# Altium PCB APB_Filter_Test_Board.PcbDoc
Units mm, origin at the board's own origin, x right, y up, seen from the top; angles counter-clockwise.
Board outline 57.4 x 16.38 mm, 2 copper layers (Top Layer, Bottom Layer); 27 components, 18 nets, 74 pads, 44 vias.
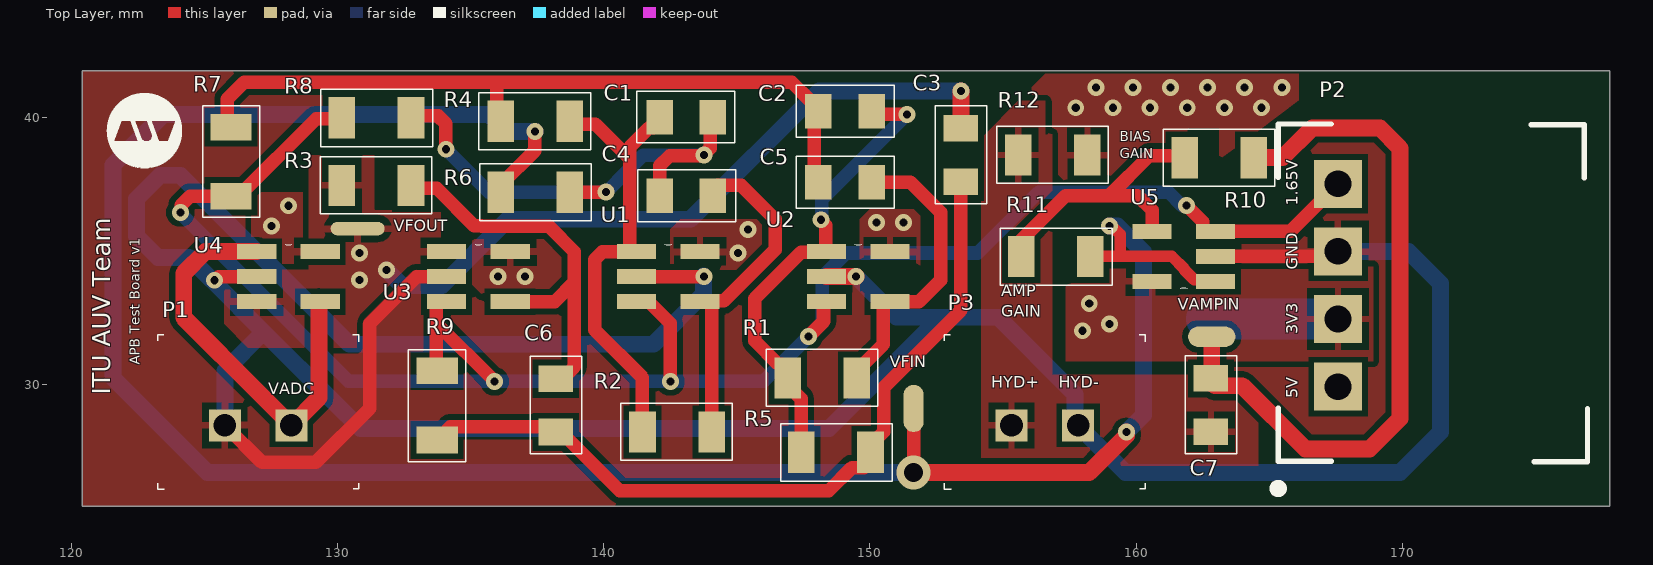
[diagram p0: Top Layer view]
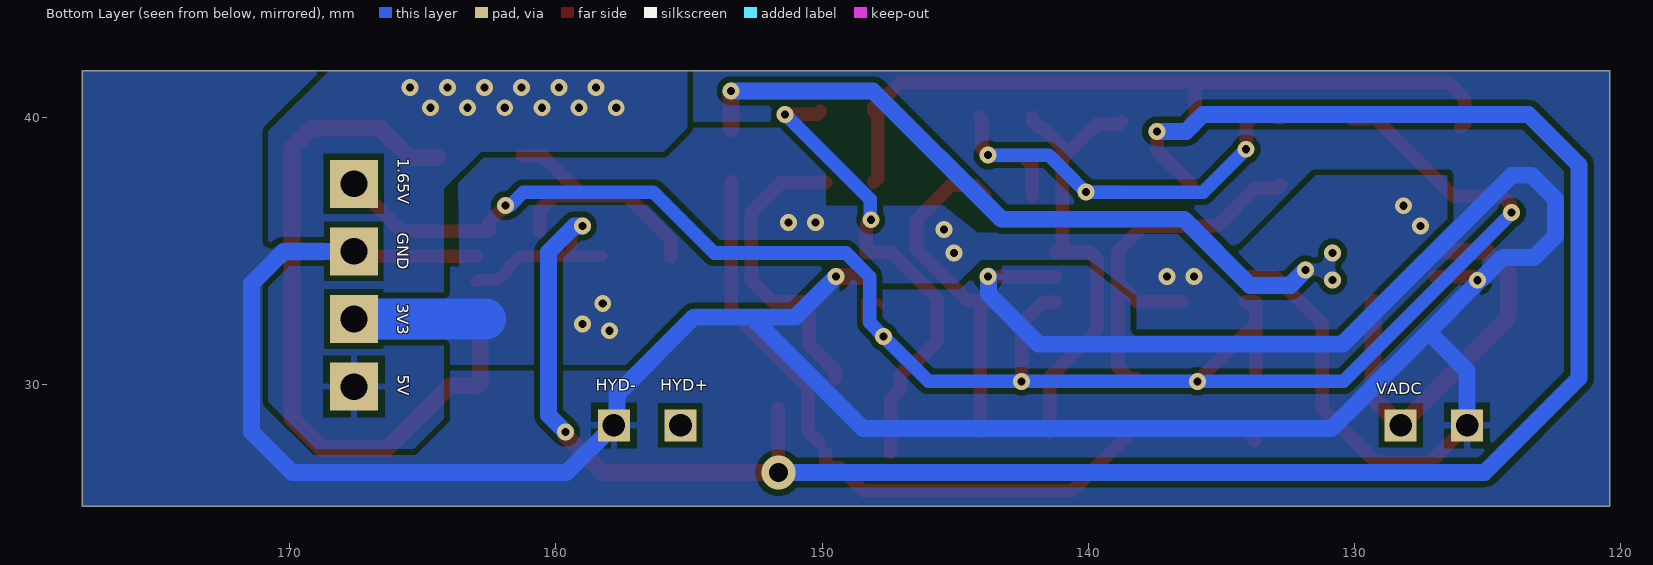
[diagram p1: Bottom Layer view, seen from below]
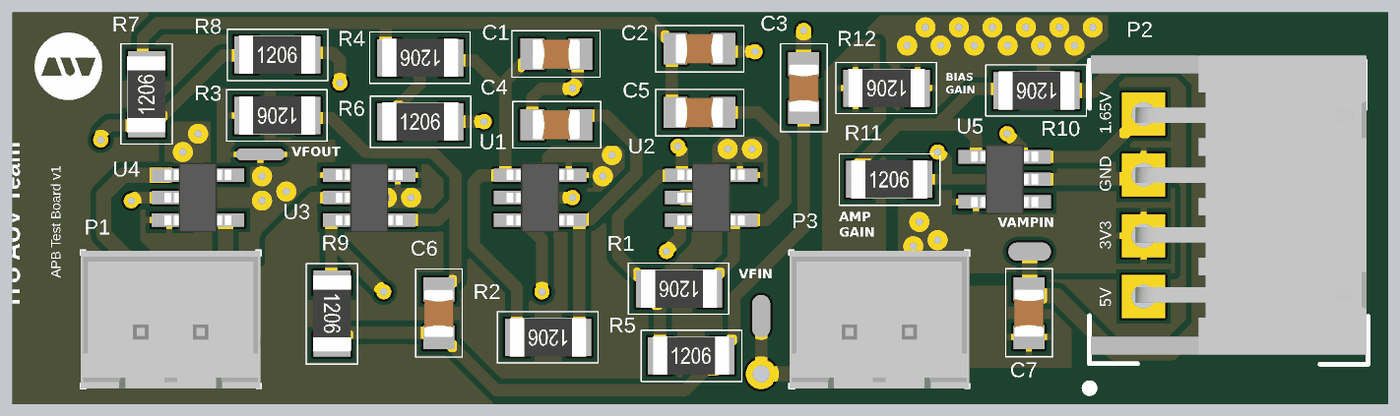
[diagram p2: 3D render of the assembled board from above, using the file's embedded part models]

## Layer stack, top to bottom
Top Solder: solder mask 0.0102, Solder Resist, Dk 3.5
Top Layer: signal copper 0.0356
Dielectric 1: dielectric 0.32, FR-4, Dk 4.8
Bottom Layer: signal copper 0.0356
Bottom Solder: solder mask 0.0102, Solder Resist, Dk 3.5

## Board outline
120.396,25.4 120.396,41.783 177.8,41.783 177.8,25.4

## Design rules (kind name [scope] priority, off if disabled: settings)
Clearance [All] p1: gap=0.229 ignorepadtopadclearanceinfootprint=FALSE except(0: Arc-Text Track-Text SMDPad-Text THPad-Text Via-Text Fill-Text Poly-Text Region-Text Text-Text Text-Hole; 0.203: SMDPad-SMDPad SMDPad-THPad THPad-THPad; 0.254: Arc-Arc Arc-Track Arc-SMDPad Arc-THPad Arc-Via Track-Track Track-SMDPad Track-THPad Track-Via SMDPad-Via THPad-Via Via-Via)
FabricationTestPointUsage [All] p1: valid=0 allowmultiple=TRUE
MinimumSolderMaskSliver [All] p1: minsoldermaskwidth=0.127
PolygonConnect [All] p1: connectstyle=Relief reliefconductorwidth=0.254 reliefentries=4 polygonreliefangle="90 Angle" airgapwidth=0.254
RoutingVias [All] p1: holewidth=0.305 width=0.635 viastyle="Through Hole" minholewidth=0.305 minwidth=0.635 maxholewidth=0.711 maxwidth=1.27
SolderMaskExpansion [All] p1: expansion=0.102 istentingtop=FALSE
Width [All] p1: maxlimit=1.524 minlimit=0.254 preferedwidth=0.635 minimp=50.000000 maximp=50.000000 favimp=50.000000
28 further rules are at their usual default settings.

## Classes and differential pairs
component class Input-Output: C7 P1 P2 P3 R10 R11 R12 U5
component class "ADC Buffering": U4
component class "6 Pole Butterworth Bandpass Filter": C1 C2 C3 C4 C5 C6 R1 R2 R3 R4 R5 R6 R7 R8 R9 U1 U2 U3

## Components (designator, comment, footprint, x,y, rotation, side; value= is the part's Value field where it differs from the comment)
C1 "1000 pF" "CAP 0805_2012 RF" 143.091,40.03 r180 top
C2 "1000 pF" "CAP 0805_2012 RF" 149.06,40.259 r0 top
C3 "1000 pF" "CAP 0805_2012 RF" 153.416,38.608 r90 top
C4 "1000 pF" "CAP 0805_2012 RF" 143.091,37.084 r0 top
C5 "1000 pF" "CAP 0805_2012 RF" 149.06,37.592 r0 top
C6 "1000 pF" "CAP 0805_2012 RF" 138.19,29.196 r90 top
C7 "0.1 µF" "CAP 0805_2012 RF" 162.814,29.21 r90 top
P1 "WIRE-TO BOARD WAFER, 2.5MM, 2 CO" 51025-02-0100-01 127,28.448 r180 top
P2 "WIRE-TO BOARD HEADER, 2.5MM, 4 C" 51125-04-0200-01 172.593,33.274 r90 top
P3 "WIRE-TO BOARD WAFER, 2.5MM, 2 CO" 51025-02-0100-01 156.571,28.448 r180 top
R1 "46.4 kOhms" "RES 1206_3216 RF" 148.209,30.226 r180 top
R2 "62 kOhms" "RES 1206_3216 RF" 142.748,28.194 r180 top
R3 "26.7 kOhms" "RES 1206_3216 RF" 131.445,37.465 r180 top locked
R4 "11.3 kOhms" "RES 1206_3216 RF" 137.414,39.878 r180 top
R5 "13.3 kOhms" "RES 1206_3216 RF" 148.72,27.432 r0 top
R6 "15.4 kOhms" "RES 1206_3216 RF" 137.414,37.211 r0 top
R7 "340 Ohms" "RES 1206_3216 RF" 125.984,38.354 r90 top
R8 "470 Ohms" "RES 1206_3216 RF" 131.445,40.005 r0 top
R9 "820 Ohms" "RES 1206_3216 RF" 133.731,29.196 r270 top
R10 "1 kOhms" "RES 1206_3216 RF" 163.131,38.507 r180 top
R11 "10 kOhms" "RES 1206_3216 RF" 156.986,34.798 r0 top locked
R12 "2 kOhms" "RES 1206_3216 RF" 156.873,38.608 r180 top
U1 "AD8065ARTZ-REEL7" SOT95P290X145-5N 142.418,34.036 r0 top
U2 "AD8065ARTZ-REEL7" SOT95P290X145-5N 149.555,34.036 r0 top
U3 "AD8065ARTZ-REEL7" SOT95P290X145-5N 135.28,34.036 r0 top
U4 "AD8065ARTZ-REEL7" SOT95P290X145-5N 128.143,34.036 r0 top
U5 "AD8065ARTZ-REEL7" SOT95P290X145-5N 161.798,34.798 r180 top

## Footprints (in the part's own frame and the unit in brackets; to place one, negate y for a bottom-side part, rotate by r counter-clockwise, add the part's x,y. Pads: shape width x height; smd on the part's side, far side on the other; paste and mask are expansions set on the pad)
51025-02-0100-01 [mm]
  rect 1.2x1.2 hole 0.85: 1(-1.25,0) 2(1.25,0)
  silkscreen extent -3.77,-3.4 3.77,2.4, body extent -3.75,-3.37 3.75,2.38, height 7
51125-04-0200-01 [mm]
  rect 1.8x1.8 hole 1: 1(-3.37,5) 2(-0.83,5) 3(1.71,5) 4(4.25,5)
  silkscreen extent -7.35,-4.38 6.5,7.4, body extent -5.8,-4.3 6.7,7.2, height 5.87
"CAP 0805_2012 RF" [mm] "Chip Capacitor, 2-Leads, Body 2.00x1.20mm, IPC High Density"
  rect 1x1.3 smd: 1(-1,0) 2(1,0)
  silkscreen extent -1.82,-0.98 1.86,0.97, body extent -1,-0.63 1,0.62, height 0.61
"RES 1206_3216 RF" [mm] "Chip Resistor, 2-Leads, Body 3.13x1.55mm, IPC High Density"
  rect 1x1.55 smd: 1(-1.3,0) 2(1.3,0)
  silkscreen extent -2.08,-1.08 2.11,1.07, body extent -1.6,-0.8 1.6,0.8, height 0.59
SOT95P290X145-5N [mil]
  rect 58x22 smd: 1(-47,37) 2(-47,0) 3(-47,-37) 4(47,-37) 5(47,37)
  silkscreen extent -5,47 5,48, body extent -55,-57 55,57, height 57

## Part data
C1 C2 C3 C4 C5 C6: library part CS0805KRX7RBBB102, "CAP CER 1000PF 500V X7R 0805", Device Package="0805 (2012 Metric)", Manufacturer=Yageo, Operating Temperature="-55°C ~ 125°C", Supplier Part Number 1=311-3593-1-ND, Temperature Coefficient=X7R, Tolerance=±10%, Voltage - Rated=500V, Applications="Boardflex Sensitive", Capacitance="1000 pF", ComponentLink1Description=Datasheet, ComponentLink1URL=http://www.yageo.com/NewPortal/yageodocoutput?fileName=/pdf/MLCC/UPY-ST_NPOX7R_16V-to-3KV_5.pdf, ComponentLink2Description="DigiKey Link", ComponentLink2URL=https://www.digikey.com/en/products/detail/yageo/CS0805KRX7RBBB102/6097992, Features="Soft Termination", lastupdated="12.04.2022 22:11:41", Lifecycle Status=Active, Minimum Order=1, Mounting Type="Surface Mount, MLCC", Package / Case="0805 (2012 Metric)", Packaging=TapeAndReel, Part Number=CS0805KRX7RBBB102, Part Status=Active, PartId=2739, Price=0.06, Series=CS, Size / Dimension="0.079\" L x 0.049\" W (2.00mm x 1.25mm)", Supplier 1=DigiKey, Thickness (Max)="0.039\" (1.00mm)"
C7: library part CC0805MRX7R9BB104, "CAP CER 0.1UF 50V X7R 0805", Device Package="0805 (2012 Metric)", Manufacturer=Yageo, Operating Temperature="-55°C ~ 125°C", Supplier Part Number 1=311-4351-1-ND, Temperature Coefficient=X7R, Tolerance=±20%, Voltage - Rated=50V, Applications="General Purpose", Capacitance="0.1 µF", ComponentLink1Description=Datasheet, ComponentLink1URL=https://www.yageo.com/upload/media/product/productsearch/datasheet/mlcc/UPY-GPHC_X7R_6.3V-to-50V_18.pdf, ComponentLink2Description="DigiKey Link", ComponentLink2URL=https://www.digikey.com/en/products/detail/yageo/CC0805MRX7R9BB104/5884281, lastupdated="12.04.2022 22:11:41", Lifecycle Status=Active, Minimum Order=1, Mounting Type="Surface Mount, MLCC", Package / Case="0805 (2012 Metric)", Packaging=TapeAndReel, Part Number=CC0805MRX7R9BB104, Part Status=Active, PartId=2475, Price=0.02, Series=CC, Size / Dimension="0.079\" L x 0.049\" W (2.00mm x 1.25mm)", Supplier 1=DigiKey, Thickness (Max)="0.037\" (0.95mm)"
P1 P3: library part 51025-02-0100-01, "Connector Header Through Hole 2 position 0.098\" (2.50mm)", Manufacturer="CNC Tech", Supplier Part Number 1=1175-51025-02-0100-01-ND, Manufacturer Part Number=51025-02-0100-01, Pricing 1="1=0,10000, 10=0,08300, 100=0,06090, 500=0,05040, 1000=0,04410, 5000=0,03780, 10000=0,03675 (USD)", RoHS=No, Stock 1=15526, Supplier 1=Digi-Key
P2: library part 51125-04-0200-01, "Wire-to Board Header, 2.5MM, 4 C", Manufacturer="CNC Tech", Supplier Part Number 1=1175-51125-04-0200-01-ND, Category=Connectors, Manufacturer Part Number=51125-04-0200-01, Pricing 1="1=0,21000, 10=0,17700, 100=0,13650, 500=0,11550, 1000=0,09450, 5000=0,08400, 10000=0,07613 (USD)", RoHS=No, Stock 1=5369, Supplier 1=Digi-Key
R1: library part RT0805DRE0746K4L, "RES SMD 46.4K OHM 0.5% 1/8W 0805", Device Package="0805 (2012 Metric)", Manufacturer=Yageo, Operating Temperature="-55°C ~ 155°C", Power (Watts)="0.125W, 1/8W", Supplier Device Package=0805, Supplier Part Number 1=311-2866-1-ND, Temperature Coefficient=±50ppm/°C, Tolerance=±0.5%, ComponentLink1Description=Datasheet, ComponentLink1URL=https://www.yageo.com/upload/media/product/productsearch/datasheet/rchip/PYu-RT_1-to-0.01_RoHS_L_11.pdf, ComponentLink2Description="DigiKey Link", ComponentLink2URL=https://www.digikey.com/en/products/detail/yageo/RT0805DRE0746K4L/1078715, Composition="Thin Film", Height - Seated (Max)="0.024\" (0.60mm)", lastupdated="12.04.2022 22:40:28", Lifecycle Status=Active, Minimum Order=1, Number of Terminations=2, Package / Case="0805 (2012 Metric)", Packaging=TapeAndReel, Part Number=RT0805DRE0746K4L, Part Status=Active, PartId=31477, Price=0.01, Resistance="46.4 kOhms", Series=RT, Size / Dimension="0.079\" L x 0.049\" W (2.00mm x 1.25mm)", Supplier 1=DigiKey
R2: library part CPF0805B62KE1, "RES SMD 62K OHM 0.1% 1/10W 0805", Device Package="0805 (2012 Metric)", Manufacturer="TE Connectivity Passive Product", Operating Temperature="-55°C ~ 155°C", Power (Watts)="0.1W, 1/10W", Supplier Device Package=0805, Supplier Part Number 1=A103230CT-ND, Temperature Coefficient=±25ppm/°C, Tolerance=±0.1%, ComponentLink1Description=Datasheet, ComponentLink1URL=https://www.te.com/commerce/DocumentDelivery/DDEController?Action=srchrtrv&DocNm=1773200&DocType=DS&DocLang=English, ComponentLink2Description="DigiKey Link", ComponentLink2URL=https://www.digikey.com/en/products/detail/te-connectivity-passive-product/CPF0805B62KE1/2382068, Composition="Thin Film", Height - Seated (Max)="0.026\" (0.65mm)", lastupdated="12.04.2022 22:40:19", Lifecycle Status=Active, Minimum Order=1, Number of Terminations=2, Package / Case="0805 (2012 Metric)", Packaging=TapeAndReel, Part Number=CPF0805B62KE1, Part Status=Active, PartId=34241, Price=0.13, Resistance="62 kOhms", Series="CPF, Neohm", Size / Dimension="0.079\" L x 0.049\" W (2.00mm x 1.25mm)", Supplier 1=DigiKey
R3: library part ERJ-6ENF2672V, "RES SMD 26.7K OHM 1% 1/8W 0805", Device Package="0805 (2012 Metric)", Manufacturer="Panasonic Electronic Components", Operating Temperature="-55°C ~ 155°C", Power (Watts)="0.125W, 1/8W", Ratings=AEC-Q200, Supplier Device Package=0805, Supplier Part Number 1=P26.7KCCT-ND, Temperature Coefficient=±100ppm/°C, Tolerance=±1%, ComponentLink1Description=Datasheet, ComponentLink1URL=https://industrial.panasonic.com/cdbs/www-data/pdf/RDA0000/AOA0000C304.pdf, ComponentLink2Description="DigiKey Link", ComponentLink2URL=https://www.digikey.com/en/products/detail/panasonic-electronic-components/ERJ-6ENF2672V/111557, Composition="Thick Film", Features="Automotive AEC-Q200", Height - Seated (Max)="0.028\" (0.70mm)", lastupdated="12.04.2022 22:40:32", Lifecycle Status=Active, Minimum Order=1, Number of Terminations=2, Package / Case="0805 (2012 Metric)", Packaging=TapeAndReel, Part Number=ERJ-6ENF2672V, Part Status=Active, PartId=30267, Price=0.01, Resistance="26.7 kOhms", Series=ERJ-6EN, Size / Dimension="0.079\" L x 0.049\" W (2.00mm x 1.25mm)", Supplier 1=DigiKey
R4: library part RK73H2ATTD1132F, "RES 11.3K OHM 1% 1/4W 0805", Device Package="0805 (2012 Metric)", Manufacturer="KOA Speer Electronics, Inc.", Operating Temperature="-55°C ~ 155°C", Power (Watts)="0.25W, 1/4W", Ratings=AEC-Q200, Supplier Device Package=0805, Supplier Part Number 1=2019-RK73H2ATTD1132FCT-ND, Temperature Coefficient=±100ppm/°C, Tolerance=±1%, ComponentLink1Description=Datasheet, ComponentLink1URL=http://www.koaspeer.com/catimages/Products/RK73H/RK73H.pdf, ComponentLink2Description="DigiKey Link", ComponentLink2URL=https://www.digikey.com/en/products/detail/koa-speer-electronics-inc/RK73H2ATTD1132F/10233627, Composition="Thick Film", Features="Automotive AEC-Q200, Moisture Resistant", Height - Seated (Max)="0.024\" (0.60mm)", lastupdated="12.04.2022 22:40:20", Lifecycle Status=Active, Minimum Order=1, Number of Terminations=2, Package / Case="0805 (2012 Metric)", Packaging=TapeAndReel, Part Number=RK73H2ATTD1132F, Part Status=Active, PartId=33915, Price=0.01, Resistance="11.3 kOhms", Series=RK73H, Size / Dimension="0.079\" L x 0.049\" W (2.00mm x 1.25mm)", Supplier 1=DigiKey
R5: library part RK73H2BTTD1332F, "RES 13.3K OHM 1% 1/4W 1206", Device Package="1206 (3216 Metric)", Manufacturer="KOA Speer Electronics, Inc.", Operating Temperature="-55°C ~ 155°C", Power (Watts)="0.25W, 1/4W", Ratings=AEC-Q200, Supplier Device Package=1206, Supplier Part Number 1=2019-RK73H2BTTD1332FCT-ND, Temperature Coefficient=±100ppm/°C, Tolerance=±1%, ComponentLink1Description=Datasheet, ComponentLink1URL=http://www.koaspeer.com/catimages/Products/RK73H/RK73H.pdf, ComponentLink2Description="DigiKey Link", ComponentLink2URL=https://www.digikey.com/en/products/detail/koa-speer-electronics-inc/RK73H2BTTD1332F/10236178, Composition="Thick Film", Features="Automotive AEC-Q200, Moisture Resistant", Height - Seated (Max)="0.028\" (0.70mm)", lastupdated="12.04.2022 22:34:22", Lifecycle Status=Active, Minimum Order=1, Number of Terminations=2, Package / Case="1206 (3216 Metric)", Packaging=TapeAndReel, Part Number=RK73H2BTTD1332F, Part Status=Active, PartId=27243, Price=0.01, Resistance="13.3 kOhms", Series=RK73H, Size / Dimension="0.126\" L x 0.063\" W (3.20mm x 1.60mm)", Supplier 1=DigiKey
R6: library part ERJ-6ENF1542V, "RES SMD 15.4K OHM 1% 1/8W 0805", Device Package="0805 (2012 Metric)", Manufacturer="Panasonic Electronic Components", Operating Temperature="-55°C ~ 155°C", Power (Watts)="0.125W, 1/8W", Ratings=AEC-Q200, Supplier Device Package=0805, Supplier Part Number 1=P15.4KCCT-ND, Temperature Coefficient=±100ppm/°C, Tolerance=±1%, ComponentLink1Description=Datasheet, ComponentLink1URL=https://industrial.panasonic.com/cdbs/www-data/pdf/RDA0000/AOA0000C304.pdf, ComponentLink2Description="DigiKey Link", ComponentLink2URL=https://www.digikey.com/en/products/detail/panasonic-electronic-components/ERJ-6ENF1542V/111510, Composition="Thick Film", Features="Automotive AEC-Q200", Height - Seated (Max)="0.028\" (0.70mm)", lastupdated="12.04.2022 22:40:33", Lifecycle Status=Active, Minimum Order=1, Number of Terminations=2, Package / Case="0805 (2012 Metric)", Packaging=TapeAndReel, Part Number=ERJ-6ENF1542V, Part Status=Active, PartId=30250, Price=0.01, Resistance="15.4 kOhms", Series=ERJ-6EN, Size / Dimension="0.079\" L x 0.049\" W (2.00mm x 1.25mm)", Supplier 1=DigiKey
R7: library part ERJ-8ENF3400V, "RES SMD 340 OHM 1% 1/4W 1206", Device Package="1206 (3216 Metric)", Manufacturer="Panasonic Electronic Components", Operating Temperature="-55°C ~ 155°C", Power (Watts)="0.25W, 1/4W", Ratings=AEC-Q200, Supplier Device Package=1206, Supplier Part Number 1=P340FCT-ND, Temperature Coefficient=±100ppm/°C, Tolerance=±1%, ComponentLink1Description=Datasheet, ComponentLink1URL=https://industrial.panasonic.com/cdbs/www-data/pdf/RDA0000/AOA0000C304.pdf, ComponentLink2Description="DigiKey Link", ComponentLink2URL=https://www.digikey.com/en/products/detail/panasonic-electronic-components/ERJ-8ENF3400V/88773, Composition="Thick Film", Features="Automotive AEC-Q200", Height - Seated (Max)="0.028\" (0.70mm)", lastupdated="12.04.2022 22:34:11", Lifecycle Status=Active, Minimum Order=1, Number of Terminations=2, Package / Case="1206 (3216 Metric)", Packaging=TapeAndReel, Part Number=ERJ-8ENF3400V, Part Status=Active, PartId=29324, Price=0.02, Resistance="340 Ohms", Series=ERJ-8EN, Size / Dimension="0.126\" L x 0.063\" W (3.20mm x 1.60mm)", Supplier 1=DigiKey
R8: library part CRGP0805F470R, "RES 470 OHM 1% 1/3W 0805", Device Package="0805 (2012 Metric)", Manufacturer="TE Connectivity Passive Product", Operating Temperature="-55°C ~ 155°C", Power (Watts)="0.333W, 1/3W", Supplier Device Package=0805, Supplier Part Number 1=A130473CT-ND, Temperature Coefficient=±100ppm/°C, Tolerance=±1%, ComponentLink1Description=Datasheet, ComponentLink1URL=https://www.te.com/commerce/DocumentDelivery/DDEController?Action=srchrtrv&DocNm=9-1773463-9&DocType=DS&DocLang=English, ComponentLink2Description="DigiKey Link", ComponentLink2URL=https://www.digikey.com/en/products/detail/te-connectivity-passive-product/CRGP0805F470R/8577075, Composition="Thick Film", Features="Pulse Withstanding", Height - Seated (Max)="0.026\" (0.65mm)", lastupdated="12.04.2022 22:40:38", Lifecycle Status=Active, Minimum Order=1, Number of Terminations=2, Package / Case="0805 (2012 Metric)", Packaging=TapeAndReel, Part Number=CRGP0805F470R, Part Status=Active, PartId=28801, Price=0.03, Resistance="470 Ohms", Series=CRGP, Size / Dimension="0.079\" L x 0.049\" W (2.00mm x 1.25mm)", Supplier 1=DigiKey
R9: library part CR0805-JW-821EPF, "RES 0805 820R 5% 125MW TC200 LOW", Device Package="0805 (2012 Metric)", Manufacturer="Bourns Inc.", Operating Temperature="-55°C ~ 155°C", Power (Watts)="0.125W, 1/8W", Supplier Device Package=0805, Supplier Part Number 1=CR0805-JW-821EPFCT-ND, Temperature Coefficient=±200ppm/°C, Tolerance=±5%, ComponentLink1Description=Datasheet, ComponentLink1URL=https://www.bourns.com/docs/Product-Datasheets/CR-PF.pdf, ComponentLink2Description="DigiKey Link", ComponentLink2URL=https://www.digikey.com/en/products/detail/bourns-inc/CR0805-JW-821EPF/8572952, Composition="Thick Film", Height - Seated (Max)="0.024\" (0.60mm)", lastupdated="12.04.2022 22:39:27", Lifecycle Status=Active, Minimum Order=1, Number of Terminations=2, Package / Case="0805 (2012 Metric)", Packaging=TapeAndReel, Part Number=CR0805-JW-821EPF, Part Status=Active, PartId=46969, Price=0.01, Resistance="820 Ohms", Series=CR-PF, Size / Dimension="0.079\" L x 0.049\" W (2.00mm x 1.25mm)", Supplier 1=DigiKey
R10: library part CRGH0805J1K0, "RES SMD 1K OHM 5% 1/3W 0805", Device Package="0805 (2012 Metric)", Manufacturer="TE Connectivity Passive Product", Operating Temperature="-55°C ~ 155°C", Power (Watts)="0.333W, 1/3W", Supplier Device Package=0805, Supplier Part Number 1=A126435CT-ND, Temperature Coefficient=±100ppm/°C, Tolerance=±5%, ComponentLink1Description=Datasheet, ComponentLink1URL=https://www.te.com/commerce/DocumentDelivery/DDEController?Action=srchrtrv&DocNm=1773204-1&DocType=DS&DocLang=English, ComponentLink2Description="DigiKey Link", ComponentLink2URL=https://www.digikey.com/en/products/detail/te-connectivity-passive-product/CRGH0805J1K0/2385524, Composition="Thick Film", lastupdated="12.04.2022 22:40:40", Lifecycle Status=Active, Minimum Order=1, Number of Terminations=2, Package / Case="0805 (2012 Metric)", Packaging=TapeAndReel, Part Number=CRGH0805J1K0, Part Status=Active, PartId=28125, Price=0.01, Resistance="1 kOhms", Series="CRGH, Neohm", Size / Dimension="0.083\" L x 0.051\" W (2.10mm x 1.30mm)", Supplier 1=DigiKey
R11: library part RNCF0805DTE10K0, "RES 10K OHM 0.5% 1/8W 0805", Device Package="0805 (2012 Metric)", Manufacturer="Stackpole Electronics Inc", Operating Temperature="-55°C ~ 155°C", Power (Watts)="0.125W, 1/8W", Ratings=AEC-Q200, Supplier Device Package=0805, Supplier Part Number 1=RNCF0805DTE10K0CT-ND, Temperature Coefficient=±25ppm/°C, Tolerance=±0.5%, ComponentLink1Description=Datasheet, ComponentLink1URL=https://www.seielect.com/catalog/sei-rncf.pdf, ComponentLink2Description="DigiKey Link", ComponentLink2URL=https://www.digikey.com/en/products/detail/stackpole-electronics-inc/RNCF0805DTE10K0/1708247, Composition="Thin Film", Features="Automotive AEC-Q200", Height - Seated (Max)="0.026\" (0.65mm)", lastupdated="12.04.2022 22:40:40", Lifecycle Status=Active, Minimum Order=1, Number of Terminations=2, Package / Case="0805 (2012 Metric)", Packaging=TapeAndReel, Part Number=RNCF0805DTE10K0, Part Status=Active, PartId=28029, Price=0.01, Resistance="10 kOhms", Series=RNCF, Size / Dimension="0.079\" L x 0.049\" W (2.00mm x 1.25mm)", Supplier 1=DigiKey
R12: library part RCS08052K00FKEA, "RES SMD 2K OHM 1% 0.4W 0805", Device Package="0805 (2012 Metric)", Manufacturer="Vishay Dale", Operating Temperature="-55°C ~ 155°C", Power (Watts)="0.4W, 2/5W", Ratings=AEC-Q200, Supplier Device Package=0805, Supplier Part Number 1=541-2840-1-ND, Temperature Coefficient=±100ppm/°C, Tolerance=±1%, ComponentLink1Description=Datasheet, ComponentLink1URL=http://www.vishay.com/docs/20065/rcse3.pdf, ComponentLink2Description="DigiKey Link", ComponentLink2URL=https://www.digikey.com/en/products/detail/vishay-dale/RCS08052K00FKEA/5866986, Composition="Thick Film", Features="Automotive AEC-Q200, Pulse Withstanding", Height - Seated (Max)="0.020\" (0.50mm)", lastupdated="12.04.2022 22:40:41", Lifecycle Status=Active, Minimum Order=1, Number of Terminations=2, Package / Case="0805 (2012 Metric)", Packaging=TapeAndReel, Part Number=RCS08052K00FKEA, Part Status=Active, PartId=27786, Price=0.03, Resistance="2 kOhms", Series="RCS e3", Size / Dimension="0.079\" L x 0.049\" W (2.00mm x 1.25mm)", Supplier 1=DigiKey
U1 U2 U3 U4 U5: "Voltage Feedback Amplifier 1 Circuit Rail-to-Rail SOT-23-5", Package="SOT-23-5 Analog Devices", Availability=Unavailable, DigiKey-Purchase-URL=https://snapeda.com/shop?store=DigiKey&id=385700, MF="Analog Devices", MP=AD8065ARTZ-REEL7, Price=None, SnapEDA_Link=https://www.snapeda.com/parts/AD8065ARTZ-REEL7/Analog%20Devices%20Inc./view-part/385700/?ref=snap

## Free pads (board coordinates)
  oval 2.032x0.508 smd: 8(130.741,35.841)
  oval 0.762x1.778 smd: 8(151.638,29.083)
  oval 1.778x0.762 smd: 8(162.845,31.779)

## Via types
v1: diameter 0.635, hole 0.305, Top Layer to Bottom Layer, 43 vias
v2: diameter 1.27, hole 0.711, Top Layer to Bottom Layer, 1 vias

## Nets (pads, with @x,y where several pads share a name; then routed paths per layer and width w, separated by ;. In a path a pad name is that pad's centre, name@x,y a point inside that pad or via, vN(x,y) a via of type N, cw(c..) or ccw(c..) an arc to the next point about the centre after c; other vN are vias at no path point)
AGND: P2.4 R7.1 R8.1 R9.1 U1.3 U2.3 U3.3 U5.3 | length 71.4
  Top Layer w0.254: U2.3@147.752,32.944 147.904,33.096 148.278,33.096 U2.3
  Top Layer w0.508: v1(124.079,36.449) 124.103,36.473 124.103,36.717 124.44,37.054 126.259,37.054 129.181,39.976 130.116,39.976 R8.1 ; R9.1@133.7,30.496 133.7,32.289 ; U3.3 133.726,33.096 133.7,33.071 133.7,32.289 ; v1(135.89,30.099) 133.7,32.289 ; U1.3 141.249,33.071 141.707,33.071 142.494,32.283 v1(142.494,30.099) ; v1(147.69,31.79) 148.252,32.352 148.252,33.071 U2.3@148.278,33.096 ; v1(161.904,36.705) 162.509,36.1 162.509,35.763 162.535,35.738 165.807,35.738 P2.4
  Bottom Layer w0.508: v1(124.079,36.449) 124.079,36.417 130.397,30.099 v1(135.89,30.099) v1(142.494,30.099) 145.999,30.099 v1(147.69,31.79) 148.209,32.309 148.209,34.036 149.098,34.925 154.051,34.925 156.337,37.211 161.225,37.211 161.731,36.705 v1(161.904,36.705)
GND: P1.2 P2.3 P3.1 U1.2 U2.2 U3.2 U4.2 U5.2 | length 126.2
  Top Layer w0.254: P2.3@167.407,34.798 P2.3
  Top Layer w0.508: v1(125.357,33.901) 125.391,33.901 125.526,34.036 U4.2 ; P1.2 127.147,27.051 129.159,27.051 131.191,29.083 131.191,32.27 132.957,34.036 U3.2 ; U1.2 v1(143.764,34.036) ; U5.2 P2.3@167.407,34.798
  Top Layer w0.635: U2.2 v1(149.479,34.036)
  Bottom Layer w0.635: P1.2 125.75,30.5 127.21,31.96 ; v1@143.742,34.058 143.74,34.055 143.74,33.377 141.859,31.496 130.429,31.496 124.079,37.846 123.317,37.846 122.428,36.957 122.428,35.56 123.23,34.758 124.412,34.758 125.269,33.901 v1(125.357,33.901) 125.357,33.813 127.21,31.96 ; v1(149.479,34.036) 151.003,32.512 152.654,32.512 ; P2.3 170.248,34.984 171.45,33.782 171.45,28.194 169.926,26.67 159.599,26.67 P3.1 157.71,28.559 157.71,29.615 154.813,32.512 152.654,32.512 ; 127.21,31.96 129.845,29.325 130.849,28.321 148.463,28.321 152.654,32.512
NetC1_1: C1.1 C4.1 R6.2 R8.2 | length 19.3
  Top Layer w0.508: R8.2 132.918,40.005 132.991,40.078 133.763,40.078 134.061,39.78 v1(134.061,38.825) ; R6.2 v1(140.081,37.211) ; C4.1 142.091,38.205 142.47,38.584 143.74,38.584 v1(143.764,38.608) 143.764,38.642 143.988,38.866 143.988,39.927 C1.1
  Bottom Layer w0.508: v1(134.061,38.825) 135.675,37.211 v1(140.081,37.211) 140.877,38.007 141.478,38.608 v1(143.764,38.608)
NetC1_2: C1.2 R2.2 R4.1 U1.1 | length 17.4
  Top Layer w0.508: R4.1 138.823,39.769 139.678,39.769 140.97,38.478 ; U1.1@140.995,34.976 140.97,35.001 140.97,38.478 ; U1.1 141.22,34.972 139.945,34.972 139.647,34.675 139.647,32.046 141.448,30.245 R2.2 ; C1.2 142.091,39.88 141.845,39.634 141.695,39.634 140.97,38.909 140.97,38.478
NetC2_1: C2.1 C5.1 R4.2 R7.2 | length 28.5
  Top Layer w0.508: R7.2 125.834,39.804 125.834,40.704 126.472,41.342 135.994,41.342 ; R4.2 135.964,40.028 135.964,41.312 135.994,41.342 ; C5.1 147.91,37.742 147.91,40.109 C2.1 148.06,40.409 147.814,40.655 147.742,40.655 147.055,41.342 135.994,41.342
NetC2_2: C2.2 R1.2 R5.1 U2.1 | length 17.9
  Top Layer w0.254: U2.1@148.336,35.001 U2.1
  Top Layer w0.508: R5.1 147.42,29.44 147.034,29.826 147.034,30.376 146.663,30.747 146.545,30.747 145.669,31.623 145.669,33.212 147.407,34.95 148.336,34.95 U2.1 ; v1(148.164,36.175) 148.164,36.14 148.336,35.969 U2.1@148.336,35.001 ; C2.2 150.187,40.132 v1(151.384,40.132)
  Bottom Layer w0.508: v1(148.164,36.175) 148.189,36.199 148.189,36.937 v1(151.384,40.132)
NetC3_1: C3.1 C6.1 R5.2 R9.2 | length 29.4
  Top Layer w0.508: R9.2 134.231,28.396 138.19,28.396 140.598,25.988 148.451,25.988 149.324,26.861 149.774,26.861 149.863,26.95 R5.2@149.863,27.4 ; R5.2@150.12,27.807 150.517,28.204 150.517,29.867 153.416,32.766 C3.1
NetC4_2: C4.2 R2.1 U1.4 | length 13.3
  Top Layer w0.508: C4.2@143.891,37.084 144.272,37.465 145.161,37.465 146.431,36.195 146.431,35.052 144.501,33.122 U1.4@144.048,33.122 ; R2.1 144.048,33.071 U1.4@144.023,33.096 ; U1.4@144.023,33.096 U1.4 U1.4@144.023,33.096
NetC5_2: C5.2 R1.1 U2.4 | length 11.6
  Top Layer w0.508: R1.1 149.509,30.501 150.495,31.487 150.495,33.071 150.52,33.096 151.841,33.096 152.654,33.909 152.654,36.449 151.511,37.592 C5.2@149.86,37.592
NetC6_2: C6.2 R3.1 U3.4 | length 15.1
  Top Layer w0.508: R3.1 132.85,37.36 133.709,37.36 135.128,35.941 135.391,35.941 135.404,35.928 137.935,35.928 138.885,34.978 138.885,33.835 ; U3.4 138.147,33.096 138.885,33.835 ; C6.2 138.44,30.196 138.885,30.642 138.885,33.835
NetR10_2: R10.2 R11.1 U5.4 | length 10.1
  Top Layer w0.508: R11.1 155.686,35.417 157.353,37.084 159.004,37.084 ; U5.4 160.604,36.532 160.053,37.084 159.004,37.084 ; 161.26,38.577 160.497,38.577 159.004,37.084
VA: P2.2 U1.5 U2.5 U3.5 U4.5 U5.5 | length 4.9
  Bottom Layer w1.524: 162.644,32.444 P2.2
  other v1: 157.988,32.004 159.004,32.258 158.242,33.02 136.017,34.036 137.033,34.036 145.034,34.925 145.415,35.814 127.508,35.941 150.241,36.068 151.257,36.068 128.143,36.703
VADC: P1.1 U4.1 U4.4 | length 15.5
  Top Layer w0.635: U4.1 125.019,34.976 124.206,34.163 124.206,32.492 127.054,29.645 P1.1 129.286,29.484 U4.4@129.286,33.058
VAMPIN: C7.2 pad.8@162.845,31.779 R10.1 | length 26.8
  Top Layer w0.635: pad.8@162.845,31.779 162.845,30.116 162.814,30.085 162.963,29.936 163.993,29.936 166.37,27.559 168.783,27.559 169.926,28.702 169.926,38.862 169.164,39.624 166.624,39.624 165.512,38.512 164.437,38.512 R10.1
Vcc: P2.1 R12.1
  other v1: 157.734,40.386 159.131,40.386 160.528,40.386 161.925,40.386 163.322,40.386 164.719,40.386 158.496,41.148 159.893,41.148 161.29,41.148 162.687,41.148 164.084,41.148 165.481,41.148
VFIN: pad.8@151.638,29.083 R6.1 R11.2 U5.1 | length 85.6
  Top Layer w0.254: R6.1 R6.1@136.144,37.241
  Top Layer w0.432: R11.2@158.286,34.795 159.398,34.795 ; v1(159.004,35.941) 159.083,35.941 159.398,35.626 159.398,34.795 ; U5.1 162.928,33.922 162.188,33.922 161.811,34.299 161.811,34.332 161.348,34.795 159.398,34.795
  Top Layer w0.508: R6.1@136.144,37.241 136.144,37.516 137.39,38.762 137.39,39.473 v1(137.414,39.497) ; v2(151.638,26.67) pad.8@151.638,29.083
  Top Layer w0.635: v2(151.638,26.67) 158.242,26.67 159.639,28.067 v1(159.639,28.194)
  Bottom Layer w0.635: v1(137.414,39.497) 136.312,39.497 135.677,40.132 123.444,40.132 121.539,38.227 121.539,30.226 125.095,26.67 v2(151.638,26.67) ; v1(159.004,35.941) 159.299,35.941 160.274,34.966 160.274,28.829 v1(159.639,28.194)
VFOUT: C3.2 pad.8@130.741,35.841 R3.2 U3.1 U4.3 | length 26.3
  Top Layer w0.635: C3.2 v1(153.416,41.021)
  Bottom Layer w0.635: v1(131.826,34.29) 132.407,33.709 133.912,33.709 136.398,36.195 143.256,36.195 148.082,41.021 v1(153.416,41.021)
  other v1: 130.81,33.909 130.81,34.925
VHYD+: C7.1 P3.2 R12.2

## Polygon pours and split planes (outlines as drawn)
GND on Top Layer "NONET_L-01_P-001" (solid, remove dead copper, pour order 16): 120.396,41.783 177.8,41.783 177.8,25.4 120.396,25.4
VA on Top Layer "NONET_L-01_P-001" (solid, pour order 12): 157.353,33.655 158.115,34.417 168.91,34.417 168.91,30.861 157.353,30.861
VA on Top Layer "NONET_L-01_P-001" (solid, pour order 10): 149.606,36.195 149.987,36.576 151.638,36.576 151.892,36.322 151.892,34.417 151.384,33.909 150.114,33.909 150.114,34.036 149.606,34.544
VA on Top Layer "NONET_L-01_P-001" (solid, pour order 9): 142.494,35.814 142.875,36.195 145.923,36.195 146.177,35.941 146.177,34.417 146.05,34.29 142.494,34.29 142.494,34.798
VA on Top Layer "NONET_L-01_P-001" (solid, pour order 6): 134.62,35.941 134.62,34.163 135.89,32.893 138.43,32.893 138.43,34.949 137.438,35.941
VA on Top Layer "NONET_L-01_P-001" (solid, pour order 5): 126.746,37.211 126.746,34.29 129.794,34.29 130.429,34.925 130.429,36.068 129.286,37.211
VFOUT on Top Layer "NONET_L-01_P-001" (solid, remove dead copper, pour order 3): 125.73,32.258 126.619,31.369 133.858,31.369 133.858,38.608 128.905,38.608 128.905,34.29 126.365,34.29 125.73,33.655
Vcc on Top Layer "NONET_L-01_P-001" (solid, remove dead copper, pour order 1): 156.083,41.148 156.591,41.656 167.427,41.656 161.651,37.322 157.623,37.322 156.083,38.862
VHYD+ on Top Layer "NONET_L-01_P-001" (solid, remove dead copper, pour order 0): 155.575,40.64 154.178,39.243 154.178,26.924 157.226,26.924 164.592,26.924 164.592,30.353 156.845,30.353 156.845,40.64
GND on Bottom Layer "NONET_L-01_P-001" (solid, remove dead copper, pour order 15): 120.396,41.783 177.8,41.783 177.8,25.4 120.396,25.4
VA on Bottom Layer "NONET_L-01_P-001" (solid, remove dead copper, pour order 8): 157.353,33.274 158.496,34.417 170.053,34.417 170.053,30.734 157.353,30.734
Vcc on Bottom Layer "NONET_L-01_P-001" (solid, pour order 2): 157.734,41.783 168.529,41.783 170.815,39.497 170.815,29.337 169.037,27.559 165.354,27.559 164.211,28.702 164.211,37.338 162.814,38.735 155.956,38.735 155.067,39.624 155.067,41.783
VA on Bottom Layer "NONET_L-01_P-001" (solid, remove dead copper, pour order 13): 149.86,37.084 149.86,30.734 161.544,30.734 163.576,30.734 163.703,39.624 151.511,39.624 149.86,37.973 149.86,37.211
VA on Bottom Layer "NONET_L-01_P-001" (solid, pour order 7): 126.492,37.846 131.445,37.846 134.239,35.052 137.033,35.052 138.176,33.909 138.176,32.004 137.541,31.369 128.905,31.369 126.492,33.782
VFOUT on Bottom Layer "NONET_L-01_P-001" (solid, remove dead copper, pour order 14): 130.175,35.814 130.683,36.322 132.715,36.322 132.842,36.449 132.915,36.376 132.915,33.152 130.805,33.152 130.175,33.782
VA on Bottom Layer "NONET_L-01_P-001" (solid, pour order 11): 137.16,35.814 144.145,35.687 145.415,36.703 151.765,36.703 151.765,33.782 144.907,33.782 144.018,34.671 139.954,34.671 138.303,33.401 137.922,33.401 134.874,33.401 134.874,33.884 136.804,35.814

## Other copper
Top Layer:
  pour cut-out: 154.178,38.879 154.295,38.879 154.295,38.337 154.178,38.337
  pour cut-out: 163.131,39.612 163.131,37.402 163.195,37.338 161.925,37.338 161.925,39.548 161.989,39.612
  pour cut-out: 154.295,38.729 154.295,38.487 154.178,38.487 154.178,38.729
  pour cut-out: 161.595,33.325 161.62,33.35 162.027,33.35 162.027,33.781 162.036,33.791 161.991,33.836 161.594,33.836 161.594,33.325
  pour cut-out: 131.399,36.536 131.374,36.561 131.374,38.608 134.239,38.608 134.239,36.449 132.128,36.449 132.039,36.538 132.036,36.534 131.404,36.534
  pour cut-out: 156.845,39.555 156.845,40.64 156.591,40.64 156.591,39.37 156.66,39.37
  pour cut-out: 162.489,39.512 162.631,39.512 162.631,38.169 162.616,38.154 162.545,38.224 162.489,38.224
  pour cut-out: 166.116,42.164 166.116,40.259 167.894,40.259 168.021,40.386 168.021,42.164

## Silkscreen, mask and mechanical layers (free items; w line width, h text height)
Top Overlay:
  region: 5477 vertices and 3 holes, not listed, extent 121.32,38.113 124.139,40.932
  text "BIAS / GAIN" at 159.385,38.354 h0.64
  text "1.65V" at 166.235,36.703 h0.76 r90
  text "VFOUT" at 132.098,35.592 h0.76
  text "GND" at 166.235,34.29 h0.76 r90
  text "VAMPIN" at 161.566,32.644 h0.76
  text "AMP / GAIN" at 154.94,32.385 h0.76
  text "3V3" at 166.235,31.877 h0.76 r90
  text "APB Test Board v1" at 122.682,30.734 h0.64 r90
  text "VFIN" at 150.749,30.48 h0.76
  text "HYD+" at 154.559,29.718 h0.76
  text "HYD-" at 157.099,29.718 h0.76
  text "ITU AUV Team" at 121.666,29.591 h1.14 r90
  text "VADC" at 127.382,29.472 h0.76
  text "5V" at 166.235,29.464 h0.76 r90
Bottom Overlay:
  text "1.65V" at 166.101,38.481 h0.76 r90
  text "GND" at 166.108,35.687 h0.76 r90
  text "3V3" at 166.108,33.02 h0.76 r90
  text "5V" at 166.099,30.353 h0.76 r90
  text "HYD+" at 156.083,29.591 h0.76
  text "HYD-" at 158.496,29.591 h0.76
  text "VADC" at 129.158,29.472 h0.76
Mechanical 15:
  the board outline again, w0.254